# Altium PCB USB Isolator PNL.PcbDoc
Units mm, origin at the board's own origin, x right, y up, seen from the top; angles counter-clockwise.
Board outline 123 x 74 mm, 4 copper layers (Top Layer, (Inserted) Int1 (GND), (Inserted) Int2 (GND), Bottom Layer); 4 components, 0 nets, 4 pads, 4 vias.
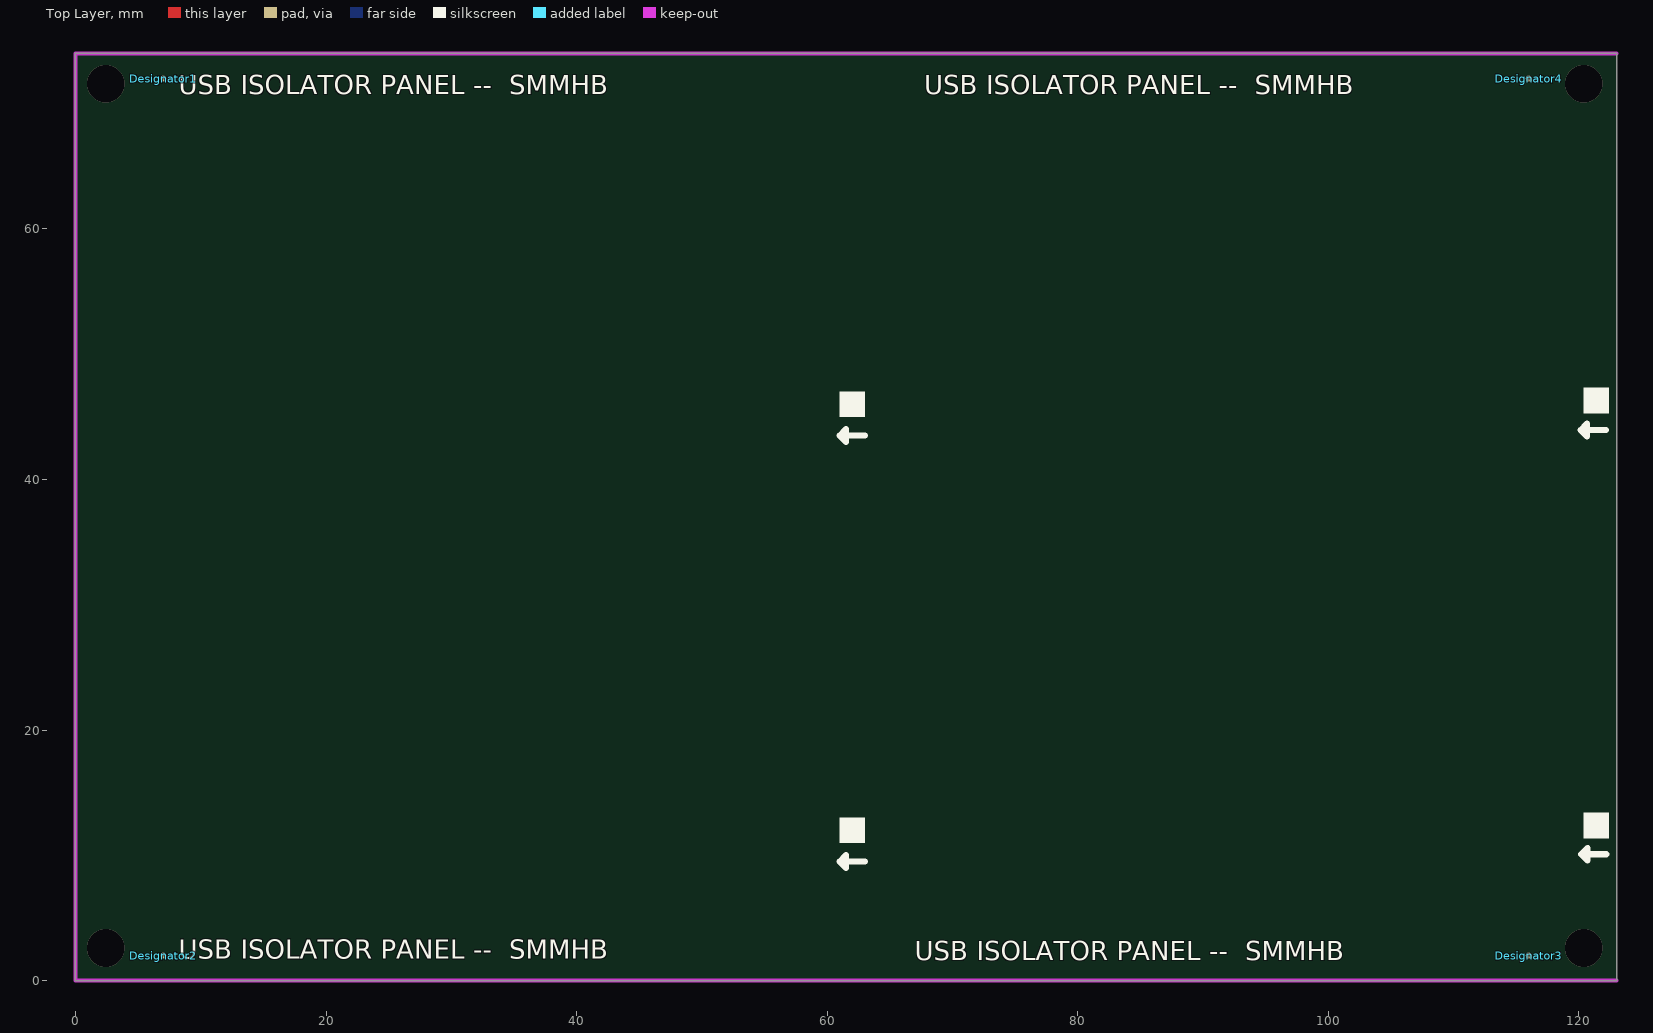
[diagram p0: Top Layer view]
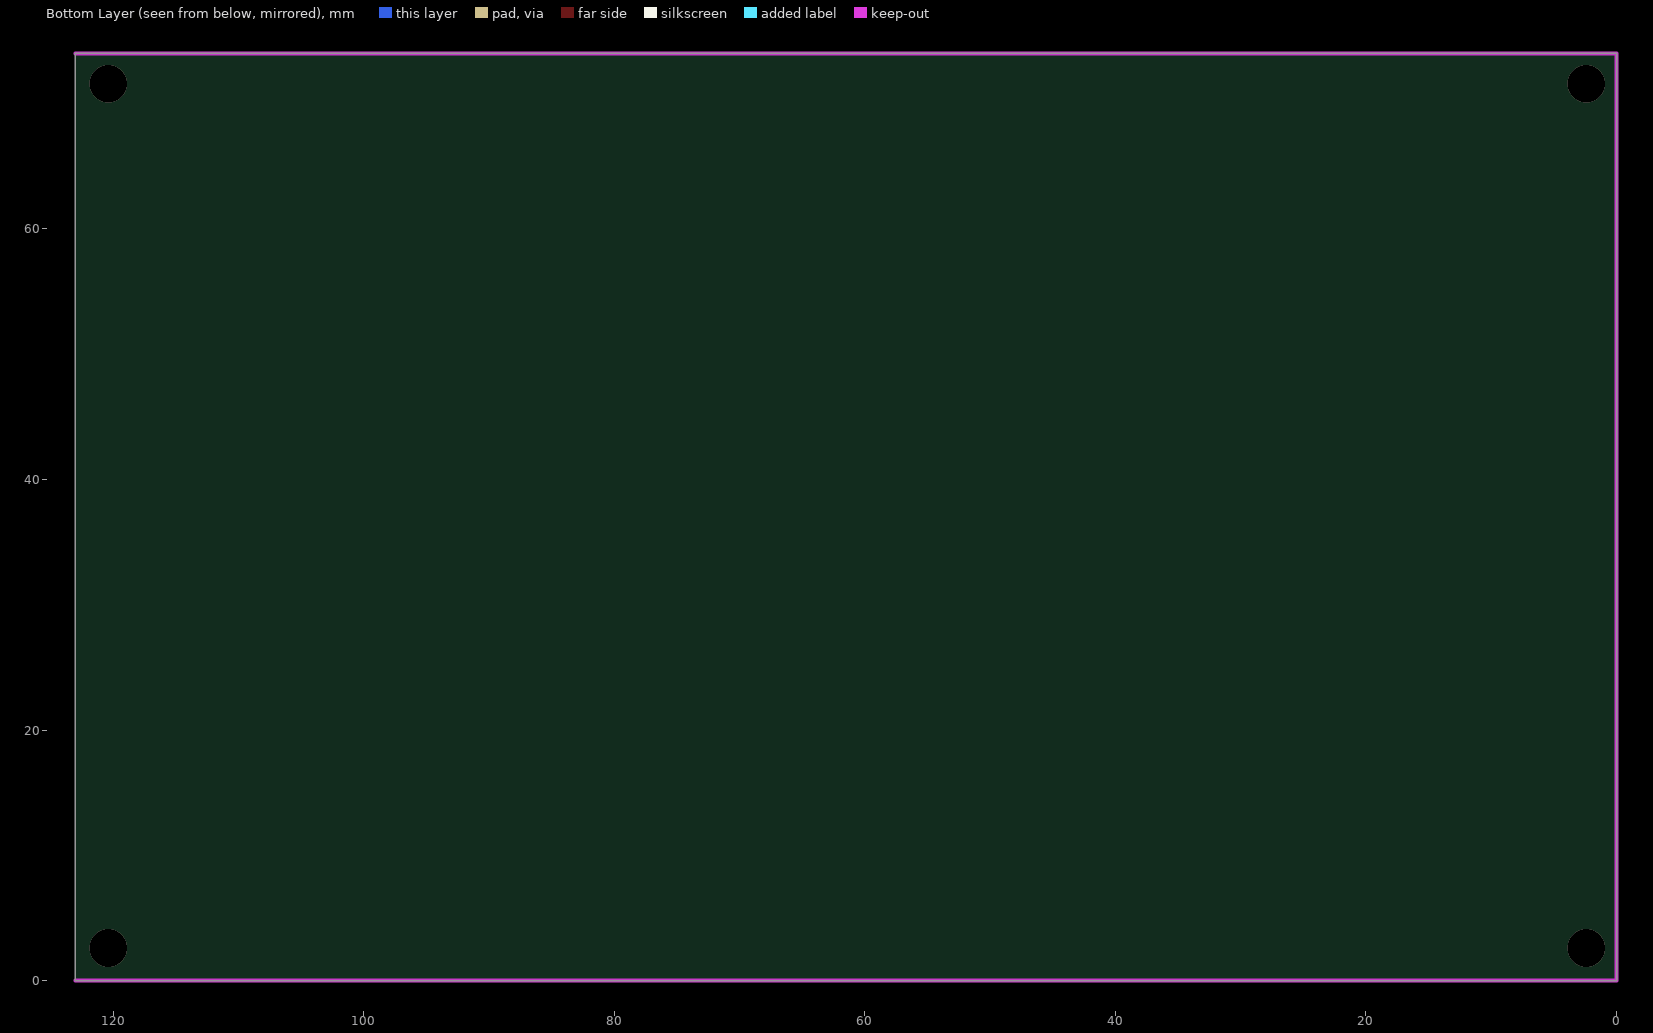
[diagram p1: Bottom Layer view, seen from below]

## Layer stack, top to bottom
Top Solder: solder mask 0.0102, Solder Resist, Dk 3.5
Top Layer: signal copper 0.0356
(Inserted) Dielectric 3: prepreg 0.32, FR-4, Dk 4.8
(Inserted) Int1 (GND): signal copper 0.0356
(Inserted) Dielectric 2: prepreg 0.32, FR-4, Dk 4.8
(Inserted) Int2 (GND): signal copper 0.0356
Dielectric 1: dielectric 0.32, FR-4, Dk 4.8
Bottom Layer: signal copper 0.0356
Bottom Solder: solder mask 0.0102, Solder Resist, Dk 3.5

## Board outline
0,0 123,0 123,74 0,74

## Design rules (kind name [scope] priority, off if disabled: settings)
Clearance [All] p1: gap=0.254 ignorepadtopadclearanceinfootprint=FALSE except(0: Arc-Hole Track-Hole SMDPad-Hole THPad-Hole Via-Hole Fill-Hole Poly-Hole Region-Hole Text-Hole)
PolygonConnect [All] p1: connectstyle=Relief reliefconductorwidth=0.254 reliefentries=4 polygonreliefangle="90 Angle" airgapwidth=0.254
RoutingVias [All] p1: holewidth=0.711 width=1.27 viastyle="Through Hole" minholewidth=0.711 minwidth=1.27 maxholewidth=0.711 maxwidth=1.27
SolderMaskExpansion [All] p1: expansion=0.102 istentingtop=FALSE
Width [All] p1: maxlimit=0.254 minlimit=0.254 preferedwidth=0.254
30 further rules are at their usual default settings.

## Components (designator, comment, footprint, x,y, rotation, side; value= is the part's Value field where it differs from the comment)
Designator1 "Comment" FID_0.5mm 7,72 r0 top
Designator2 "Comment" FID_0.5mm 7,2 r0 top
Designator3 "Comment" FID_0.5mm 116,2 r0 top
Designator4 "Comment" FID_0.5mm 116,72 r0 top

## Footprints (in the part's own frame and the unit in brackets; to place one, negate y for a bottom-side part, rotate by r counter-clockwise, add the part's x,y. Pads: shape width x height; smd on the part's side, far side on the other; paste and mask are expansions set on the pad)
FID_0.5mm [mm] "Fiducial"
  round 0.5 smd paste-10 mask+0.5: ""(0,0)

## Via types
v1: diameter 3, hole 3, Top Layer to Bottom Layer, 4 vias

## Nets (pads, with @x,y where several pads share a name; then routed paths per layer and width w, separated by ;. In a path a pad name is that pad's centre, name@x,y a point inside that pad or via, vN(x,y) a via of type N, cw(c..) or ccw(c..) an arc to the next point about the centre after c; other vN are vias at no path point)
pads on no net: Designator1. Designator2. Designator3. Designator4.
copper on no net:
  other v1: 2.4,2.6 120.4,2.6 2.4,71.6 120.4,71.6

## Keep-outs
Keep-Out Layer:
  lines w0.3: 123,0 0,0 0,74 121,74 123,74

## Silkscreen, mask and mechanical layers (free items; w line width, h text height)
Top Overlay:
  region: 61,45 63,45 63,47 61,47
  region: 120.373,11.378 122.373,11.378 122.373,13.378 120.373,13.378
  region: 120.394,45.301 122.394,45.301 122.394,47.301 120.394,47.301
  region: 61,11 63,11 63,13 61,13
  lines w0.5: 63,9.5 61,9.5 ; 63,43.5 61,43.5 ; 122.136,43.941 120.136,43.941 ; 122.188,10.088 120.188,10.088 ; 61,9.5 ccw(c61,9.5) 61,9.5 ; 61,9.5 61.5,10 ; 61,9.5 61.5,9 61.5,10 ; 61,43.5 ccw(c61,43.5) 61,43.5 ; 61,43.5 61.5,43 61.5,44 ; 61,43.5 61.5,44 ; 61.5,10 ccw(c61.5,10) 61.5,10 ; 61.5,44 ccw(c61.5,44) 61.5,44 ; 120.136,43.941 ccw(c120.136,43.941) 120.136,43.941 ; 120.136,43.941 120.636,44.441 ; 120.136,43.941 120.636,43.441 120.636,44.441 ; 120.188,10.088 ccw(c120.188,10.088) 120.188,10.088 ; 120.188,10.088 120.688,10.588 ; 120.188,10.088 120.688,9.588 120.688,10.588 ; 120.636,44.441 ccw(c120.636,44.441) 120.636,44.441 ; 120.688,10.588 ccw(c120.688,10.588) 120.688,10.588
  text "USB ISOLATOR PANEL --  SMMHB" at 8.254,70.754 h1.52
  text "USB ISOLATOR PANEL --  SMMHB" at 67.754,70.754 h1.52
  text "USB ISOLATOR PANEL --  SMMHB" at 8.254,1.754 h1.52
  text "USB ISOLATOR PANEL --  SMMHB" at 66.991,1.637 h1.52
Mechanical 1:
  lines w0.2: -3.5,5 -2,5 ; -3.5,35 -2,35 ; -3.5,39 -2,39 ; -3.5,69 -2,69 ; -2.5,5.5 -2,5 ; -2.5,35.5 -2,35 ; -2.5,39.5 -2,39 ; -2.5,69.5 -2,69 ; 4.536,-1.825 4.911,-1.5 ; 4.911,-3.525 4.911,-1.5 ; 5.286,-1.825 4.911,-1.5 ; 58.036,-1.325 58.411,-1 ; 58.411,-3.025 58.411,-1 ; 58.786,-1.325 58.411,-1 ; 64.036,-1.325 64.411,-1 ; 64.411,-3.025 64.411,-1 ; 64.786,-1.325 64.411,-1 ; 117.536,-1.825 117.911,-1.5 ; 117.911,-3.525 117.911,-1.5 ; 118.286,-1.825 117.911,-1.5 ; -2.5,4.5 ccw(c-2.5,4.5) -2.5,4.5 ; -2.5,4.5 -2,5 ; -2.5,34.5 ccw(c-2.5,34.5) -2.5,34.5 ; -2.5,34.5 -2,35 ; -2.5,38.5 ccw(c-2.5,38.5) -2.5,38.5 ; -2.5,38.5 -2,39 ; -2.5,68.5 ccw(c-2.5,68.5) -2.5,68.5 ; -2.5,68.5 -2,69 ; -2,5 ccw(c-2,5) -2,5 ; -2,5 ccw(c-2,5) -2,5 ; -2,5 ccw(c-2,5) -2,5 ; -2,35 ccw(c-2,35) -2,35 ; -2,35 ccw(c-2,35) -2,35 ; -2,35 ccw(c-2,35) -2,35 ; -2,39 ccw(c-2,39) -2,39 ; -2,39 ccw(c-2,39) -2,39 ; -2,39 ccw(c-2,39) -2,39 ; -2,69 ccw(c-2,69) -2,69 ; -2,69 ccw(c-2,69) -2,69 ; -2,69 ccw(c-2,69) -2,69
  lines w0.3: -1,5 124,5 ; -1,35 124,35 ; -1,39 124,39 ; -1,69 124,69 ; 5,-1 5,74.4 ; 58.5,-0.5 58.5,74.5 ; 64.5,-0.5 64.5,74.6 ; 118,-1 118,75 ; 123,0 123,74
  text "V-cut" at -8.5,68.5 h1
  text "V-cut" at -8.5,38.5 h1
  text "V-cut" at -8.5,34.5 h1
  text "V-cut" at -8.5,4.5 h1
  text "V-cut" at 58.911,-8.5 h1 r90
  text "V-cut" at 64.911,-8.5 h1 r90
  text "V-cut" at 5.411,-9 h1 r90
  text "V-cut" at 118.411,-9 h1 r90

## Dimensions
124.404,5 to 123,0 on Mechanical 1
124.404,35 to 124,5 on Mechanical 1
125.1,39 to 124,35 on Mechanical 1
124.404,69 to 124,39 on Mechanical 1
123,74 to 124,69 on Mechanical 1
118,75.7 to 123,74 on Mechanical 1
64.5,75.6 to 118,75 on Mechanical 1
58.5,75.6 to 64.5,74.6 on Mechanical 1
5,75.5 to 58.5,74.5 on Mechanical 1
5,74.9 to 0,75.1 on Mechanical 1

## Panel: embedded boards
"USB Isolator Board.PcbDoc" at 5,5, 2 rows x 2 columns, spacing 34 x 59.5, rotation 0